# EAGLE board uCoNo-SR (EAGLE 5.11)
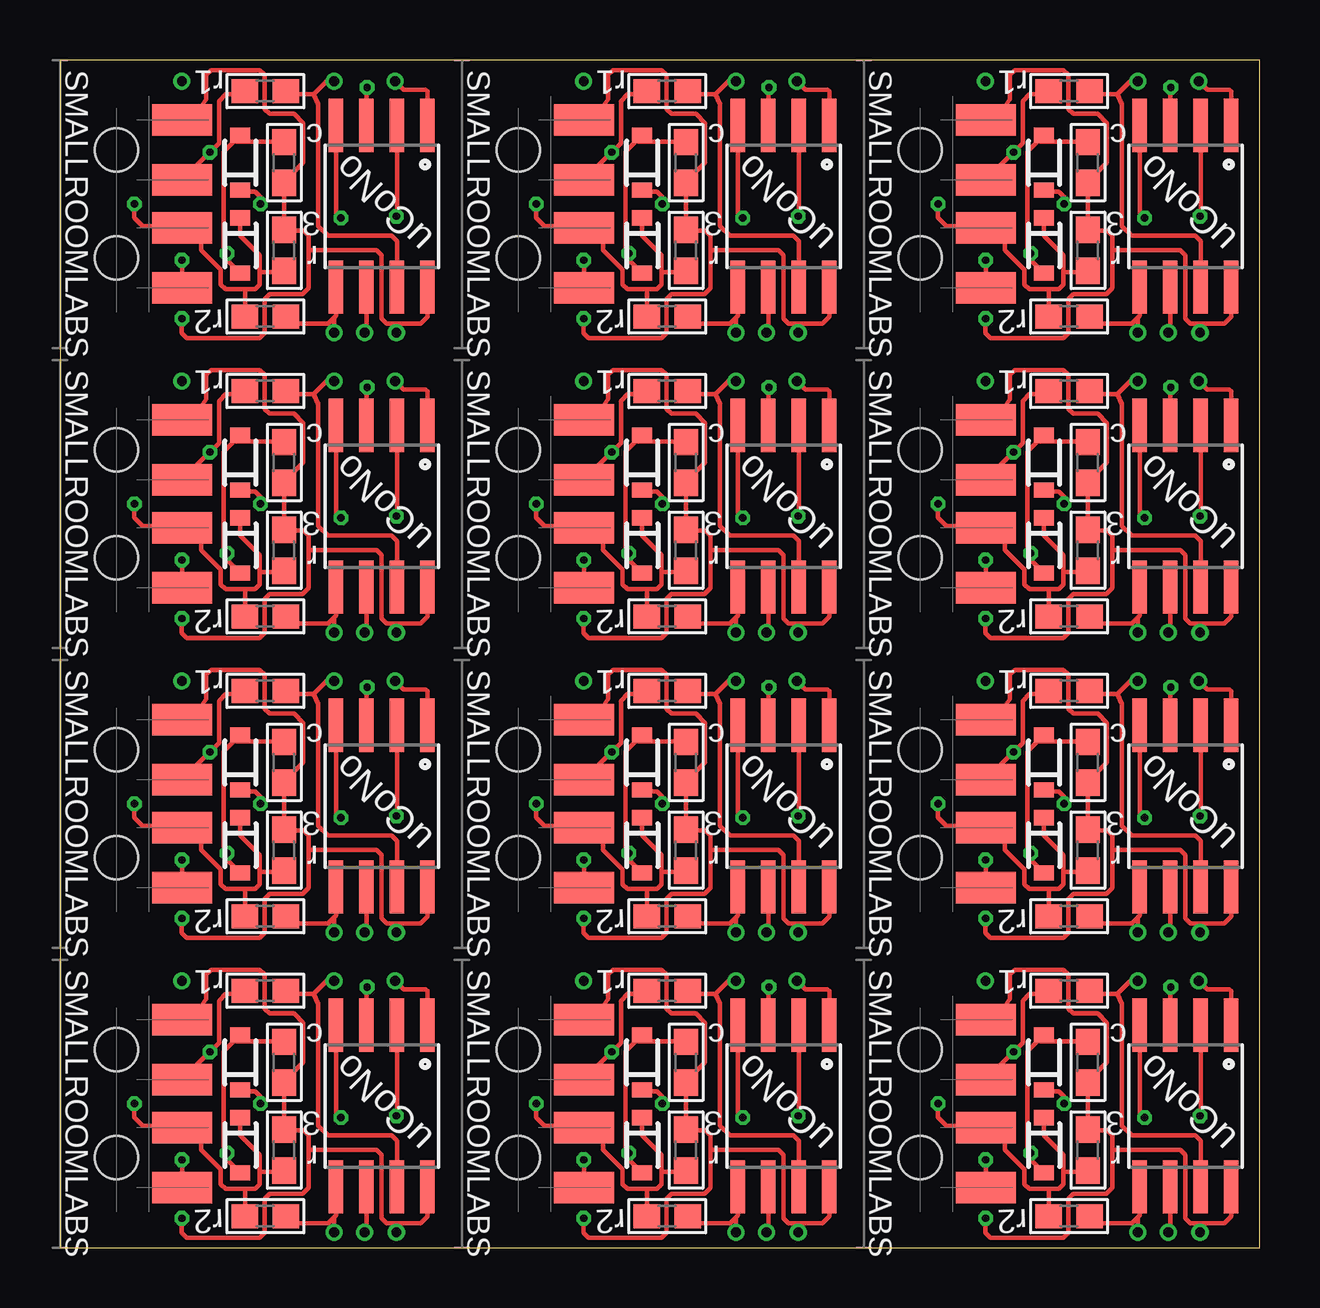
[diagram p0: board, top side]
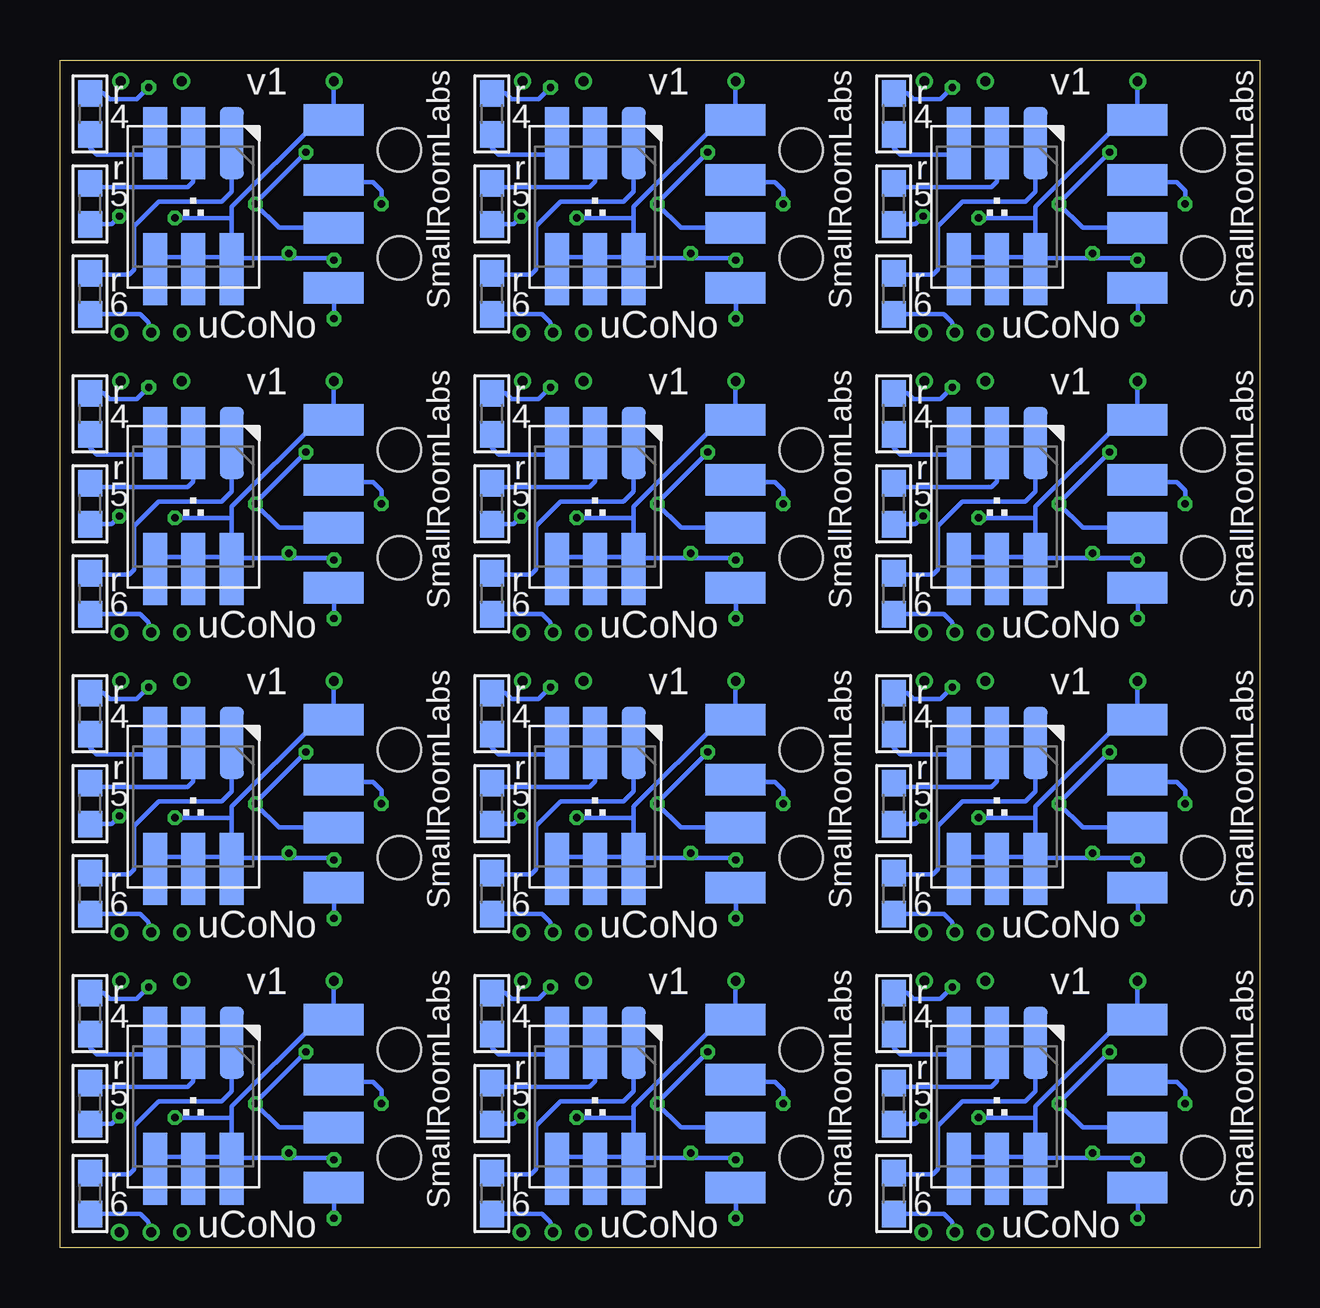
[diagram p1: board, bottom side, seen from below]

Size 50 x 49.5 mm. Coordinates in mm from the lower left corner, seen from the top.
Outline: 0,0 50,0 50,49.5 0,49.5 0,0
Copper layers (1*16): Top 0.035mm / dielectric 1.5mm / Bottom 0.035mm
Design rules "Fusion_eagle_rule_v1.1": minimum track width 6mil, minimum drill 12mil, track to track 6mil, track to pad 6mil, pad to pad 6mil, via to via 6mil, smd to smd 0mil, copper to edge 10mil, drill to drill 10mil, minimum pad ring 10mil, minimum via ring 6mil, stop-mask expansion 2mil, vias tented up to drill 100mil, thermal gap 10mil
Net classes: 0 default: width 0.178 mm, drill 0.305 mm, clearance 0.178 mm

## Footprints (pad centres in the part's own frame; a part is rotated, then mirrored left to right if it is on the bottom)
0603 = smd 1.1 x 1: 1 -0.85,0; 2 0.85,0
MC32604 = smd 1.3 x 2.5 bottom: BA 3.5,5.1; BB 1,5.1; BC -1,5.1; BD -3.5,5.1 | smd 1.3 x 2.5: TA -3.5,5.1; TB -1,5.1; TC 1,5.1; TD 3.5,5.1 | hole 1.8: -2.25,2.35; 2.25,2.35
SOD-323 = smd 0.63 x 0.83: 1 -1.15,0; 2 1.15,0
RGB-PLCC6L = smd 1 x 3: B+ 1.6,-2.658; B- 1.6,2.608; G+ 0,-2.658; G- 0,2.608; R+ -1.6,-2.658; R- -1.6,2.608
SO08-EIAJ = smd 0.61 x 2.21: 1 -1.905,-3.378; 2 -0.635,-3.378; 3 0.635,-3.378; 4 1.905,-3.378; 5 1.905,3.353; 6 0.635,3.353; 7 -0.635,3.353; 8 -1.905,3.353

## Placement (x,y rotation side)
C1  [0603]  9.35,7.72 90 top
C2  [0603]  9.35,20.22 90 top
C3  [0603]  9.35,32.72 90 top
C4  [0603]  9.35,45.22 90 top
C5  [0603]  26.1,45.22 90 top
C6  [0603]  42.85,45.22 90 top
C7  [0603]  26.1,32.72 90 top
C8  [0603]  42.85,32.72 90 top
C9  [0603]  26.1,20.22 90 top
C10  [0603]  42.85,20.22 90 top
C11  [0603]  26.1,7.72 90 top
C12  [0603]  42.85,7.72 90 top
CN1  USB-2LAYERMC32604  [MC32604]  0,6 270 top
CN2  USB-2LAYERMC32604  [MC32604]  0,18.5 270 top
CN3  USB-2LAYERMC32604  [MC32604]  0,31 270 top
CN4  USB-2LAYERMC32604  [MC32604]  0,43.5 270 top
CN5  USB-2LAYERMC32604  [MC32604]  16.75,43.5 270 top
CN6  USB-2LAYERMC32604  [MC32604]  33.5,43.5 270 top
CN7  USB-2LAYERMC32604  [MC32604]  16.75,31 270 top
CN8  USB-2LAYERMC32604  [MC32604]  33.5,31 270 top
CN9  USB-2LAYERMC32604  [MC32604]  16.75,18.5 270 top
CN10  USB-2LAYERMC32604  [MC32604]  33.5,18.5 270 top
CN11  USB-2LAYERMC32604  [MC32604]  16.75,6 270 top
CN12  USB-2LAYERMC32604  [MC32604]  33.5,6 270 top
D1  DIODE-ZENER-BZT52  [SOD-323]  7.52,4.27 270 top
D2  DIODE-ZENER-BZT52  [SOD-323]  7.52,7.72 90 top
D3  [RGB-PLCC6L]  10.94,5.88 180 bottom
D4  DIODE-ZENER-BZT52  [SOD-323]  7.52,20.22 90 top
D5  DIODE-ZENER-BZT52  [SOD-323]  7.52,16.77 270 top
D6  [RGB-PLCC6L]  10.94,18.38 180 bottom
D7  DIODE-ZENER-BZT52  [SOD-323]  7.52,32.72 90 top
D8  DIODE-ZENER-BZT52  [SOD-323]  7.52,29.27 270 top
D9  [RGB-PLCC6L]  10.94,30.88 180 bottom
D10  DIODE-ZENER-BZT52  [SOD-323]  7.52,45.22 90 top
D11  DIODE-ZENER-BZT52  [SOD-323]  7.52,41.77 270 top
D12  [RGB-PLCC6L]  10.94,43.38 180 bottom
D13  DIODE-ZENER-BZT52  [SOD-323]  24.27,45.22 90 top
D14  DIODE-ZENER-BZT52  [SOD-323]  24.27,41.77 270 top
D15  [RGB-PLCC6L]  27.69,43.38 180 bottom
D16  DIODE-ZENER-BZT52  [SOD-323]  41.02,45.22 90 top
D17  DIODE-ZENER-BZT52  [SOD-323]  41.02,41.77 270 top
D18  [RGB-PLCC6L]  44.44,43.38 180 bottom
D19  DIODE-ZENER-BZT52  [SOD-323]  24.27,32.72 90 top
D20  DIODE-ZENER-BZT52  [SOD-323]  24.27,29.27 270 top
D21  [RGB-PLCC6L]  27.69,30.88 180 bottom
D22  DIODE-ZENER-BZT52  [SOD-323]  41.02,32.72 90 top
D23  DIODE-ZENER-BZT52  [SOD-323]  41.02,29.27 270 top
D24  [RGB-PLCC6L]  44.44,30.88 180 bottom
D25  DIODE-ZENER-BZT52  [SOD-323]  24.27,20.22 90 top
D26  DIODE-ZENER-BZT52  [SOD-323]  24.27,16.77 270 top
D27  [RGB-PLCC6L]  27.69,18.38 180 bottom
D28  DIODE-ZENER-BZT52  [SOD-323]  41.02,20.22 90 top
D29  DIODE-ZENER-BZT52  [SOD-323]  41.02,16.77 270 top
D30  [RGB-PLCC6L]  44.44,18.38 180 bottom
D31  DIODE-ZENER-BZT52  [SOD-323]  24.27,7.72 90 top
D32  DIODE-ZENER-BZT52  [SOD-323]  24.27,4.27 270 top
D33  [RGB-PLCC6L]  27.69,5.88 180 bottom
D34  DIODE-ZENER-BZT52  [SOD-323]  41.02,7.72 90 top
D35  DIODE-ZENER-BZT52  [SOD-323]  41.02,4.27 270 top
D36  [RGB-PLCC6L]  44.44,5.88 180 bottom
R1  [0603]  8.56,10.7 0 top
R2  [0603]  8.56,1.31 0 top
R3  [0603]  9.35,4.06 90 top
R4  [0603]  15.25,9.75 270 bottom
R5  [0603]  15.25,6 90 bottom
R6  [0603]  15.25,2.25 90 bottom
R7  [0603]  15.25,14.75 90 bottom
R8  [0603]  15.25,18.5 90 bottom
R9  [0603]  15.25,22.25 270 bottom
R10  [0603]  8.56,13.81 0 top
R11  [0603]  8.56,23.2 0 top
R12  [0603]  9.35,16.56 90 top
R13  [0603]  15.25,27.25 90 bottom
R14  [0603]  15.25,31 90 bottom
R15  [0603]  15.25,34.75 270 bottom
R16  [0603]  8.56,26.31 0 top
R17  [0603]  8.56,35.7 0 top
R18  [0603]  9.35,29.06 90 top
R19  [0603]  15.25,39.75 90 bottom
R20  [0603]  15.25,43.5 90 bottom
R21  [0603]  15.25,47.25 270 bottom
R22  [0603]  8.56,38.81 0 top
R23  [0603]  8.56,48.2 0 top
R24  [0603]  9.35,41.56 90 top
R25  [0603]  32,39.75 90 bottom
R26  [0603]  32,43.5 90 bottom
R27  [0603]  32,47.25 270 bottom
R28  [0603]  25.31,38.81 0 top
R29  [0603]  25.31,48.2 0 top
R30  [0603]  26.1,41.56 90 top
R31  [0603]  48.75,39.75 90 bottom
R32  [0603]  48.75,43.5 90 bottom
R33  [0603]  48.75,47.25 270 bottom
R34  [0603]  42.06,38.81 0 top
R35  [0603]  42.06,48.2 0 top
R36  [0603]  42.85,41.56 90 top
R37  [0603]  32,27.25 90 bottom
R38  [0603]  32,31 90 bottom
R39  [0603]  32,34.75 270 bottom
R40  [0603]  25.31,26.31 0 top
R41  [0603]  25.31,35.7 0 top
R42  [0603]  26.1,29.06 90 top
R43  [0603]  48.75,27.25 90 bottom
R44  [0603]  48.75,31 90 bottom
R45  [0603]  48.75,34.75 270 bottom
R46  [0603]  42.06,26.31 0 top
R47  [0603]  42.06,35.7 0 top
R48  [0603]  42.85,29.06 90 top
R49  [0603]  32,14.75 90 bottom
R50  [0603]  32,18.5 90 bottom
R51  [0603]  32,22.25 270 bottom
R52  [0603]  25.31,13.81 0 top
R53  [0603]  25.31,23.2 0 top
R54  [0603]  26.1,16.56 90 top
R55  [0603]  48.75,14.75 90 bottom
R56  [0603]  48.75,18.5 90 bottom
R57  [0603]  48.75,22.25 270 bottom
R58  [0603]  42.06,13.81 0 top
R59  [0603]  42.06,23.2 0 top
R60  [0603]  42.85,16.56 90 top
R61  [0603]  32,2.25 90 bottom
R62  [0603]  32,6 90 bottom
R63  [0603]  32,9.75 270 bottom
R64  [0603]  25.31,1.31 0 top
R65  [0603]  25.31,10.7 0 top
R66  [0603]  26.1,4.06 90 top
R67  [0603]  48.75,2.25 90 bottom
R68  [0603]  48.75,6 90 bottom
R69  [0603]  48.75,9.75 270 bottom
R70  [0603]  42.06,1.31 0 top
R71  [0603]  42.06,10.7 0 top
R72  [0603]  42.85,4.06 90 top
U1  ATTINY45  [SO08-EIAJ]  13.41,5.89 180 top
U2  ATTINY45  [SO08-EIAJ]  13.41,18.39 180 top
U3  ATTINY45  [SO08-EIAJ]  13.41,30.89 180 top
U4  ATTINY45  [SO08-EIAJ]  13.41,43.39 180 top
U5  ATTINY45  [SO08-EIAJ]  30.16,43.39 180 top
U6  ATTINY45  [SO08-EIAJ]  46.91,43.39 180 top
U7  ATTINY45  [SO08-EIAJ]  30.16,30.89 180 top
U8  ATTINY45  [SO08-EIAJ]  46.91,30.89 180 top
U9  ATTINY45  [SO08-EIAJ]  30.16,18.39 180 top
U10  ATTINY45  [SO08-EIAJ]  46.91,18.39 180 top
U11  ATTINY45  [SO08-EIAJ]  30.16,5.89 180 top
U12  ATTINY45  [SO08-EIAJ]  46.91,5.89 180 top

## Library data of the parts
C1-C12 R1-R72 = microbuilder
CN1-CN12 D3 D6 D9 D12 D15 D18 D21 D24 D27 D30 D33 D36 = SmallRoomLabs
D1 D2 D4 D5 D7 D8 D10 D11 D13 D14 D16 D17 D19 D20 D22 D23 D25 D26 D28 D29 D31 D32 D34 D35 U1-U12 = SparkFun

## Nets
BLUE: R4.1 U1.3
BLUE1: R9.1 U2.3
BLUE2: R15.1 U3.3
BLUE3: R21.1 U4.3
BLUE4: R27.1 U5.3
BLUE5: R33.1 U6.3
BLUE6: R39.1 U7.3
BLUE7: R45.1 U8.3
BLUE8: R51.1 U9.3
BLUE9: R57.1 U10.3
BLUE10: R63.1 U11.3
BLUE11: R69.1 U12.3
BLUEA: D3.B+ R4.2
BLUEA1: D6.B+ R9.2
BLUEA2: D9.B+ R15.2
BLUEA3: D12.B+ R21.2
BLUEA4: D15.B+ R27.2
BLUEA5: D18.B+ R33.2
BLUEA6: D21.B+ R39.2
BLUEA7: D24.B+ R45.2
BLUEA8: D27.B+ R51.2
BLUEA9: D30.B+ R57.2
BLUEA10: D33.B+ R63.2
BLUEA11: D36.B+ R69.2
D+: CN1.BB CN1.TB D2.1 R1.1
D+1: CN2.BB CN2.TB D4.1 R11.1
D+2: CN3.BB CN3.TB D7.1 R17.1
D+3: CN4.BB CN4.TB D10.1 R23.1
D+4: CN5.BB CN5.TB D13.1 R29.1
D+5: CN6.BB CN6.TB D16.1 R35.1
D+6: CN7.BB CN7.TB D19.1 R41.1
D+7: CN8.BB CN8.TB D22.1 R47.1
D+8: CN9.BB CN9.TB D25.1 R53.1
D+9: CN10.BB CN10.TB D28.1 R59.1
D+10: CN11.BB CN11.TB D31.1 R65.1
D+11: CN12.BB CN12.TB D34.1 R71.1
D-: CN1.BC CN1.TC D1.1 R2.1 R3.1
D-1: CN2.BC CN2.TC D5.1 R10.1 R12.1
D-2: CN3.BC CN3.TC D8.1 R16.1 R18.1
D-3: CN4.BC CN4.TC D11.1 R22.1 R24.1
D-4: CN5.BC CN5.TC D14.1 R28.1 R30.1
D-5: CN6.BC CN6.TC D17.1 R34.1 R36.1
D-6: CN7.BC CN7.TC D20.1 R40.1 R42.1
D-7: CN8.BC CN8.TC D23.1 R46.1 R48.1
D-8: CN9.BC CN9.TC D26.1 R52.1 R54.1
D-9: CN10.BC CN10.TC D29.1 R58.1 R60.1
D-10: CN11.BC CN11.TC D32.1 R64.1 R66.1
D-11: CN12.BC CN12.TC D35.1 R70.1 R72.1
DATA+_SCK: R1.2 U1.7
DATA+_SCK1: R11.2 U2.7
DATA+_SCK2: R17.2 U3.7
DATA+_SCK3: R23.2 U4.7
DATA+_SCK4: R29.2 U5.7
DATA+_SCK5: R35.2 U6.7
DATA+_SCK6: R41.2 U7.7
DATA+_SCK7: R47.2 U8.7
DATA+_SCK8: R53.2 U9.7
DATA+_SCK9: R59.2 U10.7
DATA+_SCK10: R65.2 U11.7
DATA+_SCK11: R71.2 U12.7
DATA-_MOSI: R2.2 U1.5
DATA-_MOSI1: R10.2 U2.5
DATA-_MOSI2: R16.2 U3.5
DATA-_MOSI3: R22.2 U4.5
DATA-_MOSI4: R28.2 U5.5
DATA-_MOSI5: R34.2 U6.5
DATA-_MOSI6: R40.2 U7.5
DATA-_MOSI7: R46.2 U8.5
DATA-_MOSI8: R52.2 U9.5
DATA-_MOSI9: R58.2 U10.5
DATA-_MOSI10: R64.2 U11.5
DATA-_MOSI11: R70.2 U12.5
GND: C1.2 CN1.BD CN1.TD D1.2 D2.2 D3.B- D3.G- D3.R- U1.4
GND1: C2.2 CN2.BD CN2.TD D4.2 D5.2 D6.B- D6.G- D6.R- U2.4
GND2: C3.2 CN3.BD CN3.TD D7.2 D8.2 D9.B- D9.G- D9.R- U3.4
GND3: C4.2 CN4.BD CN4.TD D10.2 D11.2 D12.B- D12.G- D12.R- U4.4
GND4: C5.2 CN5.BD CN5.TD D13.2 D14.2 D15.B- D15.G- D15.R- U5.4
GND5: C6.2 CN6.BD CN6.TD D16.2 D17.2 D18.B- D18.G- D18.R- U6.4
GND6: C7.2 CN7.BD CN7.TD D19.2 D20.2 D21.B- D21.G- D21.R- U7.4
GND7: C8.2 CN8.BD CN8.TD D22.2 D23.2 D24.B- D24.G- D24.R- U8.4
GND8: C9.2 CN9.BD CN9.TD D25.2 D26.2 D27.B- D27.G- D27.R- U9.4
GND9: C10.2 CN10.BD CN10.TD D28.2 D29.2 D30.B- D30.G- D30.R- U10.4
GND10: C11.2 CN11.BD CN11.TD D31.2 D32.2 D33.B- D33.G- D33.R- U11.4
GND11: C12.2 CN12.BD CN12.TD D34.2 D35.2 D36.B- D36.G- D36.R- U12.4
GREEN: R5.1 U1.2
GREEN1: R8.1 U2.2
GREEN2: R14.1 U3.2
GREEN3: R20.1 U4.2
GREEN4: R26.1 U5.2
GREEN5: R32.1 U6.2
GREEN6: R38.1 U7.2
GREEN7: R44.1 U8.2
GREEN8: R50.1 U9.2
GREEN9: R56.1 U10.2
GREEN10: R62.1 U11.2
GREEN11: R68.1 U12.2
GREENA: D3.G+ R5.2
GREENA1: D6.G+ R8.2
GREENA2: D9.G+ R14.2
GREENA3: D12.G+ R20.2
GREENA4: D15.G+ R26.2
GREENA5: D18.G+ R32.2
GREENA6: D21.G+ R38.2
GREENA7: D24.G+ R44.2
GREENA8: D27.G+ R50.2
GREENA9: D30.G+ R56.2
GREENA10: D33.G+ R62.2
GREENA11: D36.G+ R68.2
RED_MISO: R6.1 U1.6
RED_MISO1: R7.1 U2.6
RED_MISO2: R13.1 U3.6
RED_MISO3: R19.1 U4.6
RED_MISO4: R25.1 U5.6
RED_MISO5: R31.1 U6.6
RED_MISO6: R37.1 U7.6
RED_MISO7: R43.1 U8.6
RED_MISO8: R49.1 U9.6
RED_MISO9: R55.1 U10.6
RED_MISO10: R61.1 U11.6
RED_MISO11: R67.1 U12.6
REDA: D3.R+ R6.2
REDA1: D6.R+ R7.2
REDA2: D9.R+ R13.2
REDA3: D12.R+ R19.2
REDA4: D15.R+ R25.2
REDA5: D18.R+ R31.2
REDA6: D21.R+ R37.2
REDA7: D24.R+ R43.2
REDA8: D27.R+ R49.2
REDA9: D30.R+ R55.2
REDA10: D33.R+ R61.2
REDA11: D36.R+ R67.2
RES: U1.1
RES1: U2.1
RES2: U3.1
RES3: U4.1
RES4: U5.1
RES5: U6.1
RES6: U7.1
RES7: U8.1
RES8: U9.1
RES9: U10.1
RES10: U11.1
RES11: U12.1
VCC: C1.1 CN1.BA CN1.TA R3.2 U1.8
VCC1: C2.1 CN2.BA CN2.TA R12.2 U2.8
VCC2: C3.1 CN3.BA CN3.TA R18.2 U3.8
VCC3: C4.1 CN4.BA CN4.TA R24.2 U4.8
VCC4: C5.1 CN5.BA CN5.TA R30.2 U5.8
VCC5: C6.1 CN6.BA CN6.TA R36.2 U6.8
VCC6: C7.1 CN7.BA CN7.TA R42.2 U7.8
VCC7: C8.1 CN8.BA CN8.TA R48.2 U8.8
VCC8: C9.1 CN9.BA CN9.TA R54.2 U9.8
VCC9: C10.1 CN10.BA CN10.TA R60.2 U10.8
VCC10: C11.1 CN11.BA CN11.TA R66.2 U11.8
VCC11: C12.1 CN12.BA CN12.TA R72.2 U12.8

## Tracks (layer width: path | path; a pad name or v marks a point on that pad's centre or on a via)
BLUE  (via drill 0.3)
  Top 0.178: U1.3 12.78,10.83 v12.8,10.86
  Bottom 0.178: R4.1 15.24,10.62 14.68,10.62 14.43,10.36 13.3,10.36 v12.8,10.86
BLUE1  (via drill 0.3)
  Top 0.178: U2.3 12.78,23.33 v12.8,23.36
  Bottom 0.178: R9.1 15.24,23.12 14.68,23.12 14.43,22.86 13.3,22.86 v12.8,23.36
BLUE2  (via drill 0.3)
  Top 0.178: U3.3 12.78,35.83 v12.8,35.86
  Bottom 0.178: R15.1 15.24,35.62 14.68,35.62 14.43,35.36 13.3,35.36 v12.8,35.86
BLUE3  (via drill 0.3)
  Top 0.178: U4.3 12.78,48.33 v12.8,48.36
  Bottom 0.178: R21.1 15.24,48.12 14.68,48.12 14.43,47.86 13.3,47.86 v12.8,48.36
BLUE4  (via drill 0.3)
  Top 0.178: U5.3 29.53,48.33 v29.55,48.36
  Bottom 0.178: R27.1 31.99,48.12 31.43,48.12 31.18,47.86 30.05,47.86 v29.55,48.36
BLUE5  (via drill 0.3)
  Top 0.178: U6.3 46.28,48.33 v46.3,48.36
  Bottom 0.178: R33.1 48.74,48.12 48.18,48.12 47.93,47.86 46.8,47.86 v46.3,48.36
BLUE6  (via drill 0.3)
  Top 0.178: U7.3 29.53,35.83 v29.55,35.86
  Bottom 0.178: R39.1 31.99,35.62 31.43,35.62 31.18,35.36 30.05,35.36 v29.55,35.86
BLUE7  (via drill 0.3)
  Top 0.178: U8.3 46.28,35.83 v46.3,35.86
  Bottom 0.178: R45.1 48.74,35.62 48.18,35.62 47.93,35.36 46.8,35.36 v46.3,35.86
BLUE8  (via drill 0.3)
  Top 0.178: U9.3 29.53,23.33 v29.55,23.36
  Bottom 0.178: R51.1 31.99,23.12 31.43,23.12 31.18,22.86 30.05,22.86 v29.55,23.36
BLUE9  (via drill 0.3)
  Top 0.178: U10.3 46.28,23.33 v46.3,23.36
  Bottom 0.178: R57.1 48.74,23.12 48.18,23.12 47.93,22.86 46.8,22.86 v46.3,23.36
BLUE10  (via drill 0.3)
  Top 0.178: U11.3 29.53,10.83 v29.55,10.86
  Bottom 0.178: R63.1 31.99,10.62 31.43,10.62 31.18,10.36 30.05,10.36 v29.55,10.86
BLUE11  (via drill 0.3)
  Top 0.178: U12.3 46.28,10.83 v46.3,10.86
  Bottom 0.178: R69.1 48.74,10.62 48.18,10.62 47.93,10.36 46.8,10.36 v46.3,10.86
BLUEA
  Bottom 0.178: D3.B+ 12.55,8.05 14.96,8.05 15.24,8.33 R4.2
BLUEA1
  Bottom 0.178: D6.B+ 12.55,20.55 14.96,20.55 15.24,20.83 R9.2
BLUEA2
  Bottom 0.178: D9.B+ 12.55,33.05 14.96,33.05 15.24,33.33 R15.2
BLUEA3
  Bottom 0.178: D12.B+ 12.55,45.55 14.96,45.55 15.24,45.83 R21.2
BLUEA4
  Bottom 0.178: D15.B+ 29.3,45.55 31.71,45.55 31.99,45.83 R27.2
BLUEA5
  Bottom 0.178: D18.B+ 46.05,45.55 48.46,45.55 48.74,45.83 R33.2
BLUEA6
  Bottom 0.178: D21.B+ 29.3,33.05 31.71,33.05 31.99,33.33 R39.2
BLUEA7
  Bottom 0.178: D24.B+ 46.05,33.05 48.46,33.05 48.74,33.33 R45.2
BLUEA8
  Bottom 0.178: D27.B+ 29.3,20.55 31.71,20.55 31.99,20.83 R51.2
BLUEA9
  Bottom 0.178: D30.B+ 46.05,20.55 48.46,20.55 48.74,20.83 R57.2
BLUEA10
  Bottom 0.178: D33.B+ 29.3,8.05 31.71,8.05 31.99,8.33 R63.2
BLUEA11
  Bottom 0.178: D36.B+ 46.05,8.05 48.46,8.05 48.74,8.33 R69.2
D+  (via drill 0.3)
  Top 0.178: 7.52,6.55 D2.1 7.59,6.5 8.13,6.5 8.36,6.27 v8.36,5.99 | 7.7,10.69 R1.1 7.57,10.57 6.91,10.57 6.63,10.29 6.63,8.53 v6.25,8.15 CN1.TB
  Bottom 0.178: CN1.BB 7.37,5 v8.36,5.99 8.33,6.07 v6.25,8.15
D+1  (via drill 0.3)
  Top 0.178: 7.52,19.05 D4.1 7.59,19 8.13,19 8.36,18.77 v8.36,18.49 | 7.7,23.19 R11.1 7.57,23.07 6.91,23.07 6.63,22.79 6.63,21.03 v6.25,20.65 CN2.TB
  Bottom 0.178: CN2.BB 7.37,17.5 v8.36,18.49 8.33,18.57 v6.25,20.65
D+2  (via drill 0.3)
  Top 0.178: 7.52,31.55 D7.1 7.59,31.5 8.13,31.5 8.36,31.27 v8.36,30.99 | 7.7,35.69 R17.1 7.57,35.57 6.91,35.57 6.63,35.29 6.63,33.53 v6.25,33.15 CN3.TB
  Bottom 0.178: CN3.BB 7.37,30 v8.36,30.99 8.33,31.07 v6.25,33.15
D+3  (via drill 0.3)
  Top 0.178: 7.52,44.05 D10.1 7.59,44 8.13,44 8.36,43.77 v8.36,43.49 | 7.7,48.19 R23.1 7.57,48.07 6.91,48.07 6.63,47.79 6.63,46.03 v6.25,45.65 CN4.TB
  Bottom 0.178: CN4.BB 7.37,42.5 v8.36,43.49 8.33,43.57 v6.25,45.65
D+4  (via drill 0.3)
  Top 0.178: 24.27,44.05 D13.1 24.34,44 24.88,44 25.11,43.77 v25.11,43.49 | 24.45,48.19 R29.1 24.32,48.07 23.66,48.07 23.38,47.79 23.38,46.03 v23,45.65 CN5.TB
  Bottom 0.178: CN5.BB 24.12,42.5 v25.11,43.49 25.08,43.57 v23,45.65
D+5  (via drill 0.3)
  Top 0.178: 41.02,44.05 D16.1 41.09,44 41.63,44 41.86,43.77 v41.86,43.49 | 41.2,48.19 R35.1 41.07,48.07 40.41,48.07 40.13,47.79 40.13,46.03 v39.75,45.65 CN6.TB
  Bottom 0.178: CN6.BB 40.87,42.5 v41.86,43.49 41.83,43.57 v39.75,45.65
D+6  (via drill 0.3)
  Top 0.178: 24.27,31.55 D19.1 24.34,31.5 24.88,31.5 25.11,31.27 v25.11,30.99 | 24.45,35.69 R41.1 24.32,35.57 23.66,35.57 23.38,35.29 23.38,33.53 v23,33.15 CN7.TB
  Bottom 0.178: CN7.BB 24.12,30 v25.11,30.99 25.08,31.07 v23,33.15
D+7  (via drill 0.3)
  Top 0.178: 41.02,31.55 D22.1 41.09,31.5 41.63,31.5 41.86,31.27 v41.86,30.99 | 41.2,35.69 R47.1 41.07,35.57 40.41,35.57 40.13,35.29 40.13,33.53 v39.75,33.15 CN8.TB
  Bottom 0.178: CN8.BB 40.87,30 v41.86,30.99 41.83,31.07 v39.75,33.15
D+8  (via drill 0.3)
  Top 0.178: 24.27,19.05 D25.1 24.34,19 24.88,19 25.11,18.77 v25.11,18.49 | 24.45,23.19 R53.1 24.32,23.07 23.66,23.07 23.38,22.79 23.38,21.03 v23,20.65 CN9.TB
  Bottom 0.178: CN9.BB 24.12,17.5 v25.11,18.49 25.08,18.57 v23,20.65
D+9  (via drill 0.3)
  Top 0.178: 41.02,19.05 D28.1 41.09,19 41.63,19 41.86,18.77 v41.86,18.49 | 41.2,23.19 R59.1 41.07,23.07 40.41,23.07 40.13,22.79 40.13,21.03 v39.75,20.65 CN10.TB
  Bottom 0.178: CN10.BB 40.87,17.5 v41.86,18.49 41.83,18.57 v39.75,20.65
D+10  (via drill 0.3)
  Top 0.178: 24.27,6.55 D31.1 24.34,6.5 24.88,6.5 25.11,6.27 v25.11,5.99 | 24.45,10.69 R65.1 24.32,10.57 23.66,10.57 23.38,10.29 23.38,8.53 v23,8.15 CN11.TB
  Bottom 0.178: CN11.BB 24.12,5 v25.11,5.99 25.08,6.07 v23,8.15
D+11  (via drill 0.3)
  Top 0.178: 41.02,6.55 D34.1 41.09,6.5 41.63,6.5 41.86,6.27 v41.86,5.99 | 41.2,10.69 R71.1 41.07,10.57 40.41,10.57 40.13,10.29 40.13,8.53 v39.75,8.15 CN12.TB
  Bottom 0.178: CN12.BB 40.87,5 v41.86,5.99 41.83,6.07 v39.75,8.15
D-  (via drill 0.3)
  Top 0.178: 9.35,3.23 R3.1 9.3,3.15 8.33,3.15 | 7.72,1.32 R2.1 7.71,2.43 7.72,2.44 | CN1.TC 5.11,4.98 | CN1.TC 5.03,5.05 5,5.08 3.45,5.08 3.1,5.44 v3.1,5.99 | D1.1 7.52,4.67 8.33,3.86 8.33,3.15 | 8.33,3.15 8.33,2.64 8.13,2.44 7.72,2.44 | 7.72,2.44 6.91,2.44 6.71,2.64 6.71,3.25 5.89,4.06 5.89,4.88 5.22,4.88 CN1.TC
  Bottom 0.178: CN1.BC 5.08,6.99 5,6.91 3.45,6.91 3.1,6.55 v3.1,5.99
D-1  (via drill 0.3)
  Top 0.178: 9.35,15.73 R12.1 9.3,15.65 8.33,15.65 | 7.72,13.82 R10.1 7.71,14.93 7.72,14.94 | CN2.TC 5.11,17.48 | CN2.TC 5.03,17.55 5,17.58 3.45,17.58 3.1,17.94 v3.1,18.49 | D5.1 7.52,17.17 8.33,16.36 8.33,15.65 | 8.33,15.65 8.33,15.14 8.13,14.94 7.72,14.94 | 7.72,14.94 6.91,14.94 6.71,15.14 6.71,15.75 5.89,16.56 5.89,17.38 5.22,17.38 CN2.TC
  Bottom 0.178: CN2.BC 5.08,19.48 5,19.41 3.45,19.41 3.1,19.05 v3.1,18.49
D-2  (via drill 0.3)
  Top 0.178: 9.35,28.23 R18.1 9.3,28.15 8.33,28.15 | 7.72,26.32 R16.1 7.71,27.43 7.72,27.44 | CN3.TC 5.11,29.98 | CN3.TC 5.03,30.05 5,30.08 3.45,30.08 3.1,30.44 v3.1,30.99 | D8.1 7.52,29.67 8.33,28.86 8.33,28.15 | 8.33,28.15 8.33,27.64 8.13,27.44 7.72,27.44 | 7.72,27.44 6.91,27.44 6.71,27.64 6.71,28.25 5.89,29.06 5.89,29.88 5.22,29.88 CN3.TC
  Bottom 0.178: CN3.BC 5.08,31.98 5,31.91 3.45,31.91 3.1,31.55 v3.1,30.99
D-3  (via drill 0.3)
  Top 0.178: 9.35,40.73 R24.1 9.3,40.65 8.33,40.65 | 7.72,38.82 R22.1 7.71,39.93 7.72,39.94 | CN4.TC 5.11,42.48 | CN4.TC 5.03,42.55 5,42.58 3.45,42.58 3.1,42.94 v3.1,43.49 | D11.1 7.52,42.17 8.33,41.36 8.33,40.65 | 8.33,40.65 8.33,40.14 8.13,39.94 7.72,39.94 | 7.72,39.94 6.91,39.94 6.71,40.14 6.71,40.75 5.89,41.56 5.89,42.38 5.22,42.38 CN4.TC
  Bottom 0.178: CN4.BC 5.08,44.48 5,44.41 3.45,44.41 3.1,44.05 v3.1,43.49
D-4  (via drill 0.3)
  Top 0.178: 26.1,40.73 R30.1 26.05,40.65 25.08,40.65 | 24.47,38.82 R28.1 24.46,39.93 24.47,39.94 | CN5.TC 21.86,42.48 | CN5.TC 21.78,42.55 21.75,42.58 20.2,42.58 19.85,42.94 v19.85,43.49 | D14.1 24.27,42.17 25.08,41.36 25.08,40.65 | 25.08,40.65 25.08,40.14 24.88,39.94 24.47,39.94 | 24.47,39.94 23.66,39.94 23.46,40.14 23.46,40.75 22.64,41.56 22.64,42.38 21.97,42.38 CN5.TC
  Bottom 0.178: CN5.BC 21.83,44.48 21.75,44.41 20.2,44.41 19.85,44.05 v19.85,43.49
D-5  (via drill 0.3)
  Top 0.178: 42.85,40.73 R36.1 42.8,40.65 41.83,40.65 | 41.22,38.82 R34.1 41.21,39.93 41.22,39.94 | CN6.TC 38.6,42.48 | CN6.TC 38.53,42.55 38.5,42.58 36.95,42.58 36.6,42.94 v36.6,43.49 | D17.1 41.02,42.17 41.83,41.36 41.83,40.65 | 41.83,40.65 41.83,40.14 41.63,39.94 41.22,39.94 | 41.22,39.94 40.41,39.94 40.21,40.14 40.21,40.75 39.39,41.56 39.39,42.38 38.72,42.38 CN6.TC
  Bottom 0.178: CN6.BC 38.58,44.48 38.5,44.41 36.95,44.41 36.6,44.05 v36.6,43.49
D-6  (via drill 0.3)
  Top 0.178: 26.1,28.23 R42.1 26.05,28.15 25.08,28.15 | 24.47,26.32 R40.1 24.46,27.43 24.47,27.44 | CN7.TC 21.86,29.98 | CN7.TC 21.78,30.05 21.75,30.08 20.2,30.08 19.85,30.44 v19.85,30.99 | D20.1 24.27,29.67 25.08,28.86 25.08,28.15 | 25.08,28.15 25.08,27.64 24.88,27.44 24.47,27.44 | 24.47,27.44 23.66,27.44 23.46,27.64 23.46,28.25 22.64,29.06 22.64,29.88 21.97,29.88 CN7.TC
  Bottom 0.178: CN7.BC 21.83,31.98 21.75,31.91 20.2,31.91 19.85,31.55 v19.85,30.99
D-7  (via drill 0.3)
  Top 0.178: 42.85,28.23 R48.1 42.8,28.15 41.83,28.15 | 41.22,26.32 R46.1 41.21,27.43 41.22,27.44 | CN8.TC 38.6,29.98 | CN8.TC 38.53,30.05 38.5,30.08 36.95,30.08 36.6,30.44 v36.6,30.99 | D23.1 41.02,29.67 41.83,28.86 41.83,28.15 | 41.83,28.15 41.83,27.64 41.63,27.44 41.22,27.44 | 41.22,27.44 40.41,27.44 40.21,27.64 40.21,28.25 39.39,29.06 39.39,29.88 38.72,29.88 CN8.TC
  Bottom 0.178: CN8.BC 38.58,31.98 38.5,31.91 36.95,31.91 36.6,31.55 v36.6,30.99
D-8  (via drill 0.3)
  Top 0.178: 26.1,15.73 R54.1 26.05,15.65 25.08,15.65 | 24.47,13.82 R52.1 24.46,14.93 24.47,14.94 | CN9.TC 21.86,17.48 | CN9.TC 21.78,17.55 21.75,17.58 20.2,17.58 19.85,17.94 v19.85,18.49 | D26.1 24.27,17.17 25.08,16.36 25.08,15.65 | 25.08,15.65 25.08,15.14 24.88,14.94 24.47,14.94 | 24.47,14.94 23.66,14.94 23.46,15.14 23.46,15.75 22.64,16.56 22.64,17.38 21.97,17.38 CN9.TC
  Bottom 0.178: CN9.BC 21.83,19.48 21.75,19.41 20.2,19.41 19.85,19.05 v19.85,18.49
D-9  (via drill 0.3)
  Top 0.178: 42.85,15.73 R60.1 42.8,15.65 41.83,15.65 | 41.22,13.82 R58.1 41.21,14.93 41.22,14.94 | CN10.TC 38.6,17.48 | CN10.TC 38.53,17.55 38.5,17.58 36.95,17.58 36.6,17.94 v36.6,18.49 | D29.1 41.02,17.17 41.83,16.36 41.83,15.65 | 41.83,15.65 41.83,15.14 41.63,14.94 41.22,14.94 | 41.22,14.94 40.41,14.94 40.21,15.14 40.21,15.75 39.39,16.56 39.39,17.38 38.72,17.38 CN10.TC
  Bottom 0.178: CN10.BC 38.58,19.48 38.5,19.41 36.95,19.41 36.6,19.05 v36.6,18.49
D-10  (via drill 0.3)
  Top 0.178: 26.1,3.23 R66.1 26.05,3.15 25.08,3.15 | 24.47,1.32 R64.1 24.46,2.43 24.47,2.44 | CN11.TC 21.86,4.98 | CN11.TC 21.78,5.05 21.75,5.08 20.2,5.08 19.85,5.44 v19.85,5.99 | D32.1 24.27,4.67 25.08,3.86 25.08,3.15 | 25.08,3.15 25.08,2.64 24.88,2.44 24.47,2.44 | 24.47,2.44 23.66,2.44 23.46,2.64 23.46,3.25 22.64,4.06 22.64,4.88 21.97,4.88 CN11.TC
  Bottom 0.178: CN11.BC 21.83,6.99 21.75,6.91 20.2,6.91 19.85,6.55 v19.85,5.99
D-11  (via drill 0.3)
  Top 0.178: 42.85,3.23 R72.1 42.8,3.15 41.83,3.15 | 41.22,1.32 R70.1 41.21,2.43 41.22,2.44 | CN12.TC 38.6,4.98 | CN12.TC 38.53,5.05 38.5,5.08 36.95,5.08 36.6,5.44 v36.6,5.99 | D35.1 41.02,4.67 41.83,3.86 41.83,3.15 | 41.83,3.15 41.83,2.64 41.63,2.44 41.22,2.44 | 41.22,2.44 40.41,2.44 40.21,2.64 40.21,3.25 39.39,4.06 39.39,4.88 38.72,4.88 CN12.TC
  Bottom 0.178: CN12.BC 38.58,6.99 38.5,6.91 36.95,6.91 36.6,6.55 v36.6,5.99
DATA+_SCK  (via drill 0.41)
  Top 0.178: 9.68,10.57 9.55,10.57 9.42,10.69 R1.2 9.55,10.57 10.57,10.57 | U1.7 14.05,4.45 13.82,4.67 11.18,4.67 10.77,5.08 10.77,10.16 10.57,10.57 | v11.43,11.11 11.11,11.11 10.57,10.57
DATA+_SCK1  (via drill 0.41)
  Top 0.178: 9.68,23.07 9.55,23.07 9.42,23.19 R11.2 9.55,23.07 10.57,23.07 | U2.7 14.05,16.95 13.82,17.17 11.18,17.17 10.77,17.58 10.77,22.66 10.57,23.07 | v11.43,23.61 11.11,23.61 10.57,23.07
DATA+_SCK2  (via drill 0.41)
  Top 0.178: 9.68,35.57 9.55,35.57 9.42,35.69 R17.2 9.55,35.57 10.57,35.57 | U3.7 14.05,29.45 13.82,29.67 11.18,29.67 10.77,30.08 10.77,35.16 10.57,35.57 | v11.43,36.11 11.11,36.11 10.57,35.57
DATA+_SCK3  (via drill 0.41)
  Top 0.178: 9.68,48.07 9.55,48.07 9.42,48.19 R23.2 9.55,48.07 10.57,48.07 | U4.7 14.05,41.95 13.82,42.17 11.18,42.17 10.77,42.58 10.77,47.66 10.57,48.07 | v11.43,48.61 11.11,48.61 10.57,48.07
DATA+_SCK4  (via drill 0.41)
  Top 0.178: 26.43,48.07 26.3,48.07 26.17,48.19 R29.2 26.3,48.07 27.32,48.07 | U5.7 30.8,41.95 30.57,42.17 27.93,42.17 27.52,42.58 27.52,47.66 27.32,48.07 | v28.18,48.61 27.86,48.61 27.32,48.07
DATA+_SCK5  (via drill 0.41)
  Top 0.178: 43.18,48.07 43.05,48.07 42.92,48.19 R35.2 43.05,48.07 44.07,48.07 | U6.7 47.55,41.95 47.32,42.17 44.68,42.17 44.27,42.58 44.27,47.66 44.07,48.07 | v44.93,48.61 44.61,48.61 44.07,48.07
DATA+_SCK6  (via drill 0.41)
  Top 0.178: 26.43,35.57 26.3,35.57 26.17,35.69 R41.2 26.3,35.57 27.32,35.57 | U7.7 30.8,29.45 30.57,29.67 27.93,29.67 27.52,30.08 27.52,35.16 27.32,35.57 | v28.18,36.11 27.86,36.11 27.32,35.57
DATA+_SCK7  (via drill 0.41)
  Top 0.178: 43.18,35.57 43.05,35.57 42.92,35.69 R47.2 43.05,35.57 44.07,35.57 | U8.7 47.55,29.45 47.32,29.67 44.68,29.67 44.27,30.08 44.27,35.16 44.07,35.57 | v44.93,36.11 44.61,36.11 44.07,35.57
DATA+_SCK8  (via drill 0.41)
  Top 0.178: 26.43,23.07 26.3,23.07 26.17,23.19 R53.2 26.3,23.07 27.32,23.07 | U9.7 30.8,16.95 30.57,17.17 27.93,17.17 27.52,17.58 27.52,22.66 27.32,23.07 | v28.18,23.61 27.86,23.61 27.32,23.07
DATA+_SCK9  (via drill 0.41)
  Top 0.178: 43.18,23.07 43.05,23.07 42.92,23.19 R59.2 43.05,23.07 44.07,23.07 | U10.7 47.55,16.95 47.32,17.17 44.68,17.17 44.27,17.58 44.27,22.66 44.07,23.07 | v44.93,23.61 44.61,23.61 44.07,23.07
DATA+_SCK10  (via drill 0.41)
  Top 0.178: 26.43,10.57 26.3,10.57 26.17,10.69 R65.2 26.3,10.57 27.32,10.57 | U11.7 30.8,4.45 30.57,4.67 27.93,4.67 27.52,5.08 27.52,10.16 27.32,10.57 | v28.18,11.11 27.86,11.11 27.32,10.57
DATA+_SCK11  (via drill 0.41)
  Top 0.178: 43.18,10.57 43.05,10.57 42.92,10.69 R71.2 43.05,10.57 44.07,10.57 | U12.7 47.55,4.45 47.32,4.67 44.68,4.67 44.27,5.08 44.27,10.16 44.07,10.57 | v44.93,11.11 44.61,11.11 44.07,10.57
DATA-_MOSI  (via drill 0.41)
  Top 0.178: R2.2 9.42,1.32 9.73,1.02 11.18,1.02 11.43,1.27 | 11.43,1.27 11.51,1.35 U1.5 | 11.43,1.27 v11.43,0.64
DATA-_MOSI1  (via drill 0.41)
  Top 0.178: R10.2 9.42,13.82 9.73,13.52 11.18,13.52 11.43,13.77 | 11.43,13.77 11.51,13.85 U2.5 | 11.43,13.77 v11.43,13.13
DATA-_MOSI2  (via drill 0.41)
  Top 0.178: R16.2 9.42,26.32 9.73,26.02 11.18,26.02 11.43,26.27 | 11.43,26.27 11.51,26.35 U3.5 | 11.43,26.27 v11.43,25.64
DATA-_MOSI3  (via drill 0.41)
  Top 0.178: R22.2 9.42,38.82 9.73,38.52 11.18,38.52 11.43,38.77 | 11.43,38.77 11.51,38.85 U4.5 | 11.43,38.77 v11.43,38.13
DATA-_MOSI4  (via drill 0.41)
  Top 0.178: R28.2 26.17,38.82 26.48,38.52 27.93,38.52 28.18,38.77 | 28.18,38.77 28.26,38.85 U5.5 | 28.18,38.77 v28.18,38.13
DATA-_MOSI5  (via drill 0.41)
  Top 0.178: R34.2 42.92,38.82 43.23,38.52 44.68,38.52 44.93,38.77 | 44.93,38.77 45.01,38.85 U6.5 | 44.93,38.77 v44.93,38.13
DATA-_MOSI6  (via drill 0.41)
  Top 0.178: R40.2 26.17,26.32 26.48,26.02 27.93,26.02 28.18,26.27 | 28.18,26.27 28.26,26.35 U7.5 | 28.18,26.27 v28.18,25.64
DATA-_MOSI7  (via drill 0.41)
  Top 0.178: R46.2 42.92,26.32 43.23,26.02 44.68,26.02 44.93,26.27 | 44.93,26.27 45.01,26.35 U8.5 | 44.93,26.27 v44.93,25.64
DATA-_MOSI8  (via drill 0.41)
  Top 0.178: R52.2 26.17,13.82 26.48,13.52 27.93,13.52 28.18,13.77 | 28.18,13.77 28.26,13.85 U9.5 | 28.18,13.77 v28.18,13.13
DATA-_MOSI9  (via drill 0.41)
  Top 0.178: R58.2 42.92,13.82 43.23,13.52 44.68,13.52 44.93,13.77 | 44.93,13.77 45.01,13.85 U10.5 | 44.93,13.77 v44.93,13.13
DATA-_MOSI10  (via drill 0.41)
  Top 0.178: R64.2 26.17,1.32 26.48,1.02 27.93,1.02 28.18,1.27 | 28.18,1.27 28.26,1.35 U11.5 | 28.18,1.27 v28.18,0.64
DATA-_MOSI11  (via drill 0.41)
  Top 0.178: R70.2 42.92,1.32 43.23,1.02 44.68,1.02 44.93,1.27 | 44.93,1.27 45.01,1.35 U12.5 | 44.93,1.27 v44.93,0.64
GND  (via drill 0.3, 0.41)
  Top 0.178: 6.83,3.94 6.83,8.18 D2.2 7.34,8.59 9.35,8.59 C1.2 | 6.83,3.94 6.83,3.81 D1.2 | v6.96,3.94 6.83,3.94 | v5.08,3.66 5.1,3.66 CN1.TD | U1.4 11.51,5.62 v11.71,5.41
  Bottom 0.178: D3.R- 9.35,3.79 10.92,3.79 D3.G- | 12.52,3.79 D3.B- 12.53,3.79 11.02,3.79 D3.G- | 6.96,3.73 9.27,3.73 D3.R- | CN1.BD | D3.R- 8.94,3.81 | v6.96,3.94 6.96,3.73 | CN1.BD 5.71,9.5 9.34,5.88 9.34,5.49 | 6.96,3.73 5.08,3.73 v5.08,3.66 | D3.G- 10.97,3.81 | D3.R- 9.34,5.49 | v11.71,5.41 9.41,5.41 9.34,5.49 | CN1.BD 5.1,11.09 v5.08,11.11
GND1  (via drill 0.3, 0.41)
  Top 0.178: 6.83,16.44 6.83,20.68 D4.2 7.34,21.09 9.35,21.09 C2.2 | 6.83,16.44 6.83,16.31 D5.2 | v6.96,16.44 6.83,16.44 | v5.08,16.16 5.1,16.16 CN2.TD | U2.4 11.51,18.12 v11.71,17.91
  Bottom 0.178: D6.R- 9.35,16.29 10.92,16.29 D6.G- | 12.52,16.29 D6.B- 12.53,16.29 11.02,16.29 D6.G- | 6.96,16.23 9.27,16.23 D6.R- | CN2.BD | D6.R- 8.94,16.31 | v6.96,16.44 6.96,16.23 | CN2.BD 5.71,22 9.34,18.38 9.34,17.99 | 6.96,16.23 5.08,16.23 v5.08,16.16 | D6.G- 10.97,16.31 | D6.R- 9.34,17.99 | v11.71,17.91 9.41,17.91 9.34,17.99 | CN2.BD 5.1,23.59 v5.08,23.61
GND2  (via drill 0.3, 0.41)
  Top 0.178: 6.83,28.94 6.83,33.18 D7.2 7.34,33.59 9.35,33.59 C3.2 | 6.83,28.94 6.83,28.81 D8.2 | v6.96,28.94 6.83,28.94 | v5.08,28.66 5.1,28.66 CN3.TD | U3.4 11.51,30.62 v11.71,30.41
  Bottom 0.178: D9.R- 9.35,28.79 10.92,28.79 D9.G- | 12.52,28.79 D9.B- 12.53,28.79 11.02,28.79 D9.G- | 6.96,28.73 9.27,28.73 D9.R- | CN3.BD | D9.R- 8.94,28.81 | v6.96,28.94 6.96,28.73 | CN3.BD 5.71,34.5 9.34,30.88 9.34,30.49 | 6.96,28.73 5.08,28.73 v5.08,28.66 | D9.G- 10.97,28.81 | D9.R- 9.34,30.49 | v11.71,30.41 9.41,30.41 9.34,30.49 | CN3.BD 5.1,36.09 v5.08,36.11
GND3  (via drill 0.3, 0.41)
  Top 0.178: 6.83,41.44 6.83,45.68 D10.2 7.34,46.09 9.35,46.09 C4.2 | 6.83,41.44 6.83,41.31 D11.2 | v6.96,41.44 6.83,41.44 | v5.08,41.16 5.1,41.16 CN4.TD | U4.4 11.51,43.12 v11.71,42.91
  Bottom 0.178: D12.R- 9.35,41.28 10.92,41.28 D12.G- | 12.52,41.28 D12.B- 12.53,41.28 11.02,41.28 D12.G- | 6.96,41.23 9.27,41.23 D12.R- | CN4.BD | D12.R- 8.94,41.31 | v6.96,41.44 6.96,41.23 | CN4.BD 5.71,47 9.34,43.38 9.34,42.99 | 6.96,41.23 5.08,41.23 v5.08,41.16 | D12.G- 10.97,41.31 | D12.R- 9.34,42.99 | v11.71,42.91 9.41,42.91 9.34,42.99 | CN4.BD 5.1,48.59 v5.08,48.61
GND4  (via drill 0.3, 0.41)
  Top 0.178: 23.58,41.44 23.58,45.68 D13.2 24.09,46.09 26.1,46.09 C5.2 | 23.58,41.44 23.58,41.31 D14.2 | v23.71,41.44 23.58,41.44 | v21.83,41.16 21.85,41.16 CN5.TD | U5.4 28.26,43.12 v28.46,42.91
  Bottom 0.178: D15.R- 26.1,41.28 27.67,41.28 D15.G- | 29.27,41.28 D15.B- 29.28,41.28 27.77,41.28 D15.G- | 23.71,41.23 26.02,41.23 D15.R- | CN5.BD | D15.R- 25.69,41.31 | v23.71,41.44 23.71,41.23 | CN5.BD 22.46,47 26.09,43.38 26.09,42.99 | 23.71,41.23 21.83,41.23 v21.83,41.16 | D15.G- 27.72,41.31 | D15.R- 26.09,42.99 | v28.46,42.91 26.16,42.91 26.09,42.99 | CN5.BD 21.85,48.59 v21.83,48.61
GND5  (via drill 0.3, 0.41)
  Top 0.178: 40.33,41.44 40.33,45.68 D16.2 40.84,46.09 42.85,46.09 C6.2 | 40.33,41.44 40.33,41.31 D17.2 | v40.46,41.44 40.33,41.44 | v38.58,41.16 38.6,41.16 CN6.TD | U6.4 45.01,43.12 v45.21,42.91
  Bottom 0.178: D18.R- 42.85,41.28 44.42,41.28 D18.G- | 46.02,41.28 D18.B- 46.03,41.28 44.52,41.28 D18.G- | 40.46,41.23 42.77,41.23 D18.R- | CN6.BD | D18.R- 42.44,41.31 | v40.46,41.44 40.46,41.23 | CN6.BD 39.22,47 42.84,43.38 42.84,42.99 | 40.46,41.23 38.58,41.23 v38.58,41.16 | D18.G- 44.47,41.31 | D18.R- 42.84,42.99 | v45.21,42.91 42.91,42.91 42.84,42.99 | CN6.BD 38.6,48.59 v38.58,48.61
GND6  (via drill 0.3, 0.41)
  Top 0.178: 23.58,28.94 23.58,33.18 D19.2 24.09,33.59 26.1,33.59 C7.2 | 23.58,28.94 23.58,28.81 D20.2 | v23.71,28.94 23.58,28.94 | v21.83,28.66 21.85,28.66 CN7.TD | U7.4 28.26,30.62 v28.46,30.41
  Bottom 0.178: D21.R- 26.1,28.79 27.67,28.79 D21.G- | 29.27,28.79 D21.B- 29.28,28.79 27.77,28.79 D21.G- | 23.71,28.73 26.02,28.73 D21.R- | CN7.BD | D21.R- 25.69,28.81 | v23.71,28.94 23.71,28.73 | CN7.BD 22.46,34.5 26.09,30.88 26.09,30.49 | 23.71,28.73 21.83,28.73 v21.83,28.66 | D21.G- 27.72,28.81 | D21.R- 26.09,30.49 | v28.46,30.41 26.16,30.41 26.09,30.49 | CN7.BD 21.85,36.09 v21.83,36.11
GND7  (via drill 0.3, 0.41)
  Top 0.178: 40.33,28.94 40.33,33.18 D22.2 40.84,33.59 42.85,33.59 C8.2 | 40.33,28.94 40.33,28.81 D23.2 | v40.46,28.94 40.33,28.94 | v38.58,28.66 38.6,28.66 CN8.TD | U8.4 45.01,30.62 v45.21,30.41
  Bottom 0.178: D24.R- 42.85,28.79 44.42,28.79 D24.G- | 46.02,28.79 D24.B- 46.03,28.79 44.52,28.79 D24.G- | 40.46,28.73 42.77,28.73 D24.R- | CN8.BD | D24.R- 42.44,28.81 | v40.46,28.94 40.46,28.73 | CN8.BD 39.22,34.5 42.84,30.88 42.84,30.49 | 40.46,28.73 38.58,28.73 v38.58,28.66 | D24.G- 44.47,28.81 | D24.R- 42.84,30.49 | v45.21,30.41 42.91,30.41 42.84,30.49 | CN8.BD 38.6,36.09 v38.58,36.11
GND8  (via drill 0.3, 0.41)
  Top 0.178: 23.58,16.44 23.58,20.68 D25.2 24.09,21.09 26.1,21.09 C9.2 | 23.58,16.44 23.58,16.31 D26.2 | v23.71,16.44 23.58,16.44 | v21.83,16.16 21.85,16.16 CN9.TD | U9.4 28.26,18.12 v28.46,17.91
  Bottom 0.178: D27.R- 26.1,16.29 27.67,16.29 D27.G- | 29.27,16.29 D27.B- 29.28,16.29 27.77,16.29 D27.G- | 23.71,16.23 26.02,16.23 D27.R- | CN9.BD | D27.R- 25.69,16.31 | v23.71,16.44 23.71,16.23 | CN9.BD 22.46,22 26.09,18.38 26.09,17.99 | 23.71,16.23 21.83,16.23 v21.83,16.16 | D27.G- 27.72,16.31 | D27.R- 26.09,17.99 | v28.46,17.91 26.16,17.91 26.09,17.99 | CN9.BD 21.85,23.59 v21.83,23.61
GND9  (via drill 0.3, 0.41)
  Top 0.178: 40.33,16.44 40.33,20.68 D28.2 40.84,21.09 42.85,21.09 C10.2 | 40.33,16.44 40.33,16.31 D29.2 | v40.46,16.44 40.33,16.44 | v38.58,16.16 38.6,16.16 CN10.TD | U10.4 45.01,18.12 v45.21,17.91
  Bottom 0.178: D30.R- 42.85,16.29 44.42,16.29 D30.G- | 46.02,16.29 D30.B- 46.03,16.29 44.52,16.29 D30.G- | 40.46,16.23 42.77,16.23 D30.R- | CN10.BD | D30.R- 42.44,16.31 | v40.46,16.44 40.46,16.23 | CN10.BD 39.22,22 42.84,18.38 42.84,17.99 | 40.46,16.23 38.58,16.23 v38.58,16.16 | D30.G- 44.47,16.31 | D30.R- 42.84,17.99 | v45.21,17.91 42.91,17.91 42.84,17.99 | CN10.BD 38.6,23.59 v38.58,23.61
GND10  (via drill 0.3, 0.41)
  Top 0.178: 23.58,3.94 23.58,8.18 D31.2 24.09,8.59 26.1,8.59 C11.2 | 23.58,3.94 23.58,3.81 D32.2 | v23.71,3.94 23.58,3.94 | v21.83,3.66 21.85,3.66 CN11.TD | U11.4 28.26,5.62 v28.46,5.41
  Bottom 0.178: D33.R- 26.1,3.79 27.67,3.79 D33.G- | 29.27,3.79 D33.B- 29.28,3.79 27.77,3.79 D33.G- | 23.71,3.73 26.02,3.73 D33.R- | CN11.BD | D33.R- 25.69,3.81 | v23.71,3.94 23.71,3.73 | CN11.BD 22.46,9.5 26.09,5.88 26.09,5.49 | 23.71,3.73 21.83,3.73 v21.83,3.66 | D33.G- 27.72,3.81 | D33.R- 26.09,5.49 | v28.46,5.41 26.16,5.41 26.09,5.49 | CN11.BD 21.85,11.09 v21.83,11.11
GND11  (via drill 0.3, 0.41)
  Top 0.178: 40.33,3.94 40.33,8.18 D34.2 40.84,8.59 42.85,8.59 C12.2 | 40.33,3.94 40.33,3.81 D35.2 | v40.46,3.94 40.33,3.94 | v38.58,3.66 38.6,3.66 CN12.TD | U12.4 45.01,5.62 v45.21,5.41
  Bottom 0.178: D36.R- 42.85,3.79 44.42,3.79 D36.G- | 46.02,3.79 D36.B- 46.03,3.79 44.52,3.79 D36.G- | 40.46,3.73 42.77,3.73 D36.R- | CN12.BD | D36.R- 42.44,3.81 | v40.46,3.94 40.46,3.73 | CN12.BD 39.22,9.5 42.84,5.88 42.84,5.49 | 40.46,3.73 38.58,3.73 v38.58,3.66 | D36.G- 44.47,3.81 | D36.R- 42.84,5.49 | v45.21,5.41 42.91,5.41 42.84,5.49 | CN12.BD 38.6,11.09 v38.58,11.11
GREEN  (via drill 0.3)
  Top 0.178: U1.2 14.05,5.51 v14.02,5.49
  Bottom 0.178: R5.1 14.35,5.16 v14.02,5.49
GREEN1  (via drill 0.3)
  Top 0.178: U2.2 14.05,18.01 v14.02,17.99
  Bottom 0.178: R8.1 14.35,17.66 v14.02,17.99
GREEN2  (via drill 0.3)
  Top 0.178: U3.2 14.05,30.51 v14.02,30.49
  Bottom 0.178: R14.1 14.35,30.16 v14.02,30.49
GREEN3  (via drill 0.3)
  Top 0.178: U4.2 14.05,43.01 v14.02,42.99
  Bottom 0.178: R20.1 14.35,42.66 v14.02,42.99
GREEN4  (via drill 0.3)
  Top 0.178: U5.2 30.8,43.01 v30.77,42.99
  Bottom 0.178: R26.1 31.1,42.66 v30.77,42.99
GREEN5  (via drill 0.3)
  Top 0.178: U6.2 47.55,43.01 v47.52,42.99
  Bottom 0.178: R32.1 47.85,42.66 v47.52,42.99
GREEN6  (via drill 0.3)
  Top 0.178: U7.2 30.8,30.51 v30.77,30.49
  Bottom 0.178: R38.1 31.1,30.16 v30.77,30.49
GREEN7  (via drill 0.3)
  Top 0.178: U8.2 47.55,30.51 v47.52,30.49
  Bottom 0.178: R44.1 47.85,30.16 v47.52,30.49
GREEN8  (via drill 0.3)
  Top 0.178: U9.2 30.8,18.01 v30.77,17.99
  Bottom 0.178: R50.1 31.1,17.66 v30.77,17.99
GREEN9  (via drill 0.3)
  Top 0.178: U10.2 47.55,18.01 v47.52,17.99
  Bottom 0.178: R56.1 47.85,17.66 v47.52,17.99
GREEN10  (via drill 0.3)
  Top 0.178: U11.2 30.8,5.51 v30.77,5.49
  Bottom 0.178: R62.1 31.1,5.16 v30.77,5.49
GREEN11  (via drill 0.3)
  Top 0.178: U12.2 47.55,5.51 v47.52,5.49
  Bottom 0.178: R68.1 47.85,5.16 v47.52,5.49
GREENA
  Bottom 0.178: 15.16,6.76 15.24,6.83 R5.2 15.11,6.71 11.18,6.71 10.95,6.93 10.95,8.03 D3.G+
GREENA1
  Bottom 0.178: 15.16,19.26 15.24,19.33 R8.2 15.11,19.21 11.18,19.21 10.95,19.43 10.95,20.53 D6.G+
GREENA2
  Bottom 0.178: 15.16,31.76 15.24,31.83 R14.2 15.11,31.71 11.18,31.71 10.95,31.93 10.95,33.03 D9.G+
GREENA3
  Bottom 0.178: 15.16,44.26 15.24,44.33 R20.2 15.11,44.21 11.18,44.21 10.95,44.43 10.95,45.53 D12.G+
GREENA4
  Bottom 0.178: 31.91,44.26 31.99,44.33 R26.2 31.86,44.21 27.93,44.21 27.7,44.43 27.7,45.53 D15.G+
GREENA5
  Bottom 0.178: 48.66,44.26 48.74,44.33 R32.2 48.61,44.21 44.68,44.21 44.45,44.43 44.45,45.53 D18.G+
GREENA6
  Bottom 0.178: 31.91,31.76 31.99,31.83 R38.2 31.86,31.71 27.93,31.71 27.7,31.93 27.7,33.03 D21.G+
GREENA7
  Bottom 0.178: 48.66,31.76 48.74,31.83 R44.2 48.61,31.71 44.68,31.71 44.45,31.93 44.45,33.03 D24.G+
GREENA8
  Bottom 0.178: 31.91,19.26 31.99,19.33 R50.2 31.86,19.21 27.93,19.21 27.7,19.43 27.7,20.53 D27.G+
GREENA9
  Bottom 0.178: 48.66,19.26 48.74,19.33 R56.2 48.61,19.21 44.68,19.21 44.45,19.43 44.45,20.53 D30.G+
GREENA10
  Bottom 0.178: 31.91,6.76 31.99,6.83 R62.2 31.86,6.71 27.93,6.71 27.7,6.93 27.7,8.03 D33.G+
GREENA11
  Bottom 0.178: 48.66,6.76 48.74,6.83 R68.2 48.61,6.71 44.68,6.71 44.45,6.93 44.45,8.03 D36.G+
RED_MISO  (via drill 0.41)
  Top 0.178: U1.6 12.78,0.71 v12.7,0.64
  Bottom 0.178: R6.1 13.15,1.4 12.83,1.08 v12.7,0.64
RED_MISO1  (via drill 0.41)
  Top 0.178: U2.6 12.78,13.21 v12.7,13.13
  Bottom 0.178: R7.1 13.15,13.9 12.83,13.58 v12.7,13.13
RED_MISO2  (via drill 0.41)
  Top 0.178: U3.6 12.78,25.71 v12.7,25.64
  Bottom 0.178: R13.1 13.15,26.4 12.83,26.08 v12.7,25.64
RED_MISO3  (via drill 0.41)
  Top 0.178: U4.6 12.78,38.21 v12.7,38.13
  Bottom 0.178: R19.1 13.15,38.9 12.83,38.58 v12.7,38.13
RED_MISO4  (via drill 0.41)
  Top 0.178: U5.6 29.53,38.21 v29.45,38.13
  Bottom 0.178: R25.1 29.9,38.9 29.58,38.58 v29.45,38.13
RED_MISO5  (via drill 0.41)
  Top 0.178: U6.6 46.28,38.21 v46.2,38.13
  Bottom 0.178: R31.1 46.65,38.9 46.33,38.58 v46.2,38.13
RED_MISO6  (via drill 0.41)
  Top 0.178: U7.6 29.53,25.71 v29.45,25.64
  Bottom 0.178: R37.1 29.9,26.4 29.58,26.08 v29.45,25.64
RED_MISO7  (via drill 0.41)
  Top 0.178: U8.6 46.28,25.71 v46.2,25.64
  Bottom 0.178: R43.1 46.65,26.4 46.33,26.08 v46.2,25.64
RED_MISO8  (via drill 0.41)
  Top 0.178: U9.6 29.53,13.21 v29.45,13.13
  Bottom 0.178: R49.1 29.9,13.9 29.58,13.58 v29.45,13.13
RED_MISO9  (via drill 0.41)
  Top 0.178: U10.6 46.28,13.21 v46.2,13.13
  Bottom 0.178: R55.1 46.65,13.9 46.33,13.58 v46.2,13.13
RED_MISO10  (via drill 0.41)
  Top 0.178: U11.6 29.53,0.71 v29.45,0.64
  Bottom 0.178: R61.1 29.9,1.4 29.58,1.08 v29.45,0.64
RED_MISO11  (via drill 0.41)
  Top 0.178: U12.6 46.28,0.71 v46.2,0.64
  Bottom 0.178: R67.1 46.65,1.4 46.33,1.08 v46.2,0.64
REDA
  Bottom 0.178: 9.35,7.75 9.35,8.03 D3.R+ 9.34,6.51 9.75,6.1 12.39,6.1 13.41,5.08 13.41,3.25 13.61,3.05 15.16,3.05 15.24,3.12 R6.2
REDA1
  Bottom 0.178: 9.35,20.25 9.35,20.53 D6.R+ 9.34,19.01 9.75,18.6 12.39,18.6 13.41,17.58 13.41,15.75 13.61,15.55 15.16,15.55 15.24,15.62 R7.2
REDA2
  Bottom 0.178: 9.35,32.75 9.35,33.03 D9.R+ 9.34,31.51 9.75,31.1 12.39,31.1 13.41,30.08 13.41,28.25 13.61,28.05 15.16,28.05 15.24,28.12 R13.2
REDA3
  Bottom 0.178: 9.35,45.25 9.35,45.53 D12.R+ 9.34,44.01 9.75,43.6 12.39,43.6 13.41,42.58 13.41,40.75 13.61,40.55 15.16,40.55 15.24,40.62 R19.2
REDA4
  Bottom 0.178: 26.1,45.25 26.1,45.53 D15.R+ 26.09,44.01 26.5,43.6 29.14,43.6 30.16,42.58 30.16,40.75 30.36,40.55 31.91,40.55 31.99,40.62 R25.2
REDA5
  Bottom 0.178: 42.85,45.25 42.85,45.53 D18.R+ 42.84,44.01 43.25,43.6 45.9,43.6 46.91,42.58 46.91,40.75 47.11,40.55 48.66,40.55 48.74,40.62 R31.2
REDA6
  Bottom 0.178: 26.1,32.75 26.1,33.03 D21.R+ 26.09,31.51 26.5,31.1 29.14,31.1 30.16,30.08 30.16,28.25 30.36,28.05 31.91,28.05 31.99,28.12 R37.2
REDA7
  Bottom 0.178: 42.85,32.75 42.85,33.03 D24.R+ 42.84,31.51 43.25,31.1 45.9,31.1 46.91,30.08 46.91,28.25 47.11,28.05 48.66,28.05 48.74,28.12 R43.2
REDA8
  Bottom 0.178: 26.1,20.25 26.1,20.53 D27.R+ 26.09,19.01 26.5,18.6 29.14,18.6 30.16,17.58 30.16,15.75 30.36,15.55 31.91,15.55 31.99,15.62 R49.2
REDA9
  Bottom 0.178: 42.85,20.25 42.85,20.53 D30.R+ 42.84,19.01 43.25,18.6 45.9,18.6 46.91,17.58 46.91,15.75 47.11,15.55 48.66,15.55 48.74,15.62 R55.2
REDA10
  Bottom 0.178: 26.1,7.75 26.1,8.03 D33.R+ 26.09,6.51 26.5,6.1 29.14,6.1 30.16,5.08 30.16,3.25 30.36,3.05 31.91,3.05 31.99,3.12 R61.2
REDA11
  Bottom 0.178: 42.85,7.75 42.85,8.03 D36.R+ 42.84,6.51 43.25,6.1 45.9,6.1 46.91,5.08 46.91,3.25 47.11,3.05 48.66,3.05 48.74,3.12 R67.2
RES  (via drill 0.41)
  Top 0.178: U1.1 15.32,10.69 15.24,10.77 14.31,10.77 v13.97,11.11
RES1  (via drill 0.41)
  Top 0.178: U2.1 15.32,23.19 15.24,23.27 14.31,23.27 v13.97,23.61
RES2  (via drill 0.41)
  Top 0.178: U3.1 15.32,35.69 15.24,35.77 14.31,35.77 v13.97,36.11
RES3  (via drill 0.41)
  Top 0.178: U4.1 15.32,48.19 15.24,48.27 14.31,48.27 v13.97,48.61
RES4  (via drill 0.41)
  Top 0.178: U5.1 32.07,48.19 31.99,48.27 31.06,48.27 v30.72,48.61
RES5  (via drill 0.41)
  Top 0.178: U6.1 48.82,48.19 48.74,48.27 47.81,48.27 v47.47,48.61
RES6  (via drill 0.41)
  Top 0.178: U7.1 32.07,35.69 31.99,35.77 31.06,35.77 v30.72,36.11
RES7  (via drill 0.41)
  Top 0.178: U8.1 48.82,35.69 48.74,35.77 47.81,35.77 v47.47,36.11
RES8  (via drill 0.41)
  Top 0.178: U9.1 32.07,23.19 31.99,23.27 31.06,23.27 v30.72,23.61
RES9  (via drill 0.41)
  Top 0.178: U10.1 48.82,23.19 48.74,23.27 47.81,23.27 v47.47,23.61
RES10  (via drill 0.41)
  Top 0.178: U11.1 32.07,10.69 31.99,10.77 31.06,10.77 v30.72,11.11
RES11  (via drill 0.41)
  Top 0.178: U12.1 48.82,10.69 48.74,10.77 47.81,10.77 v47.47,11.11
VCC  (via drill 0.3, 0.41)
  Top 0.178: R3.2 C1.1 9.37,6.96 10.13,7.72 10.13,9.37 9.75,9.75 8.74,9.75 8.53,9.96 8.53,11.38 8.33,11.58 6.3,11.58 6.1,11.38 6.1,10.36 5.69,9.75 5.35,9.75 CN1.TA 5.11,9.53 | R3.2 9.42,4.88 10.16,4.88 10.36,4.67 10.36,4.06 | R3.2 9.38,4.88 | U1.8 15.32,1.29 15.04,1.02 14.02,1.02 | 14.02,1.02 13.61,1.02 13.41,1.22 13.41,3.86 13.21,4.06 10.36,4.06 | 10.36,4.06 10.36,2.49 10.11,2.23 8.74,2.23 8.53,2.03 8.53,0.61 8.33,0.41 5.28,0.41 5.08,0.61 v5.08,1.22 | 14.02,1.02 v14.02,0.64
  Bottom 0.178: CN1.BA 5.11,2.49 5.28,2.31 5.08,2.31 v5.08,1.22
VCC1  (via drill 0.3, 0.41)
  Top 0.178: R12.2 C2.1 9.37,19.46 10.13,20.22 10.13,21.87 9.75,22.25 8.74,22.25 8.53,22.46 8.53,23.88 8.33,24.08 6.3,24.08 6.1,23.88 6.1,22.86 5.69,22.25 5.35,22.25 CN2.TA 5.11,22.02 | R12.2 9.42,17.38 10.16,17.38 10.36,17.17 10.36,16.56 | R12.2 9.38,17.38 | U2.8 15.32,13.79 15.04,13.52 14.02,13.52 | 14.02,13.52 13.61,13.52 13.41,13.72 13.41,16.36 13.21,16.56 10.36,16.56 | 10.36,16.56 10.36,14.99 10.11,14.73 8.74,14.73 8.53,14.53 8.53,13.11 8.33,12.91 5.28,12.91 5.08,13.11 v5.08,13.72 | 14.02,13.52 v14.02,13.13
  Bottom 0.178: CN2.BA 5.28,14.81 5.08,14.81 v5.08,13.72
VCC2  (via drill 0.3, 0.41)
  Top 0.178: R18.2 C3.1 9.37,31.96 10.13,32.72 10.13,34.37 9.75,34.75 8.74,34.75 8.53,34.96 8.53,36.38 8.33,36.58 6.3,36.58 6.1,36.38 6.1,35.36 5.69,34.75 5.35,34.75 CN3.TA 5.11,34.52 | R18.2 9.42,29.88 10.16,29.88 10.36,29.67 10.36,29.06 | R18.2 9.38,29.88 | U3.8 15.32,26.3 15.04,26.02 14.02,26.02 | 14.02,26.02 13.61,26.02 13.41,26.22 13.41,28.86 13.21,29.06 10.36,29.06 | 10.36,29.06 10.36,27.49 10.11,27.23 8.74,27.23 8.53,27.03 8.53,25.61 8.33,25.41 5.28,25.41 5.08,25.61 v5.08,26.22 | 14.02,26.02 v14.02,25.64
  Bottom 0.178: CN3.BA 5.28,27.31 5.08,27.31 v5.08,26.22
VCC3  (via drill 0.3, 0.41)
  Top 0.178: R24.2 C4.1 9.37,44.46 10.13,45.22 10.13,46.87 9.75,47.25 8.74,47.25 8.53,47.46 8.53,48.88 8.33,49.08 6.3,49.08 6.1,48.88 6.1,47.86 5.69,47.25 5.35,47.25 CN4.TA 5.11,47.02 | R24.2 9.42,42.38 10.16,42.38 10.36,42.17 10.36,41.56 | R24.2 9.38,42.38 | U4.8 15.32,38.8 15.04,38.52 14.02,38.52 | 14.02,38.52 13.61,38.52 13.41,38.72 13.41,41.36 13.21,41.56 10.36,41.56 | 10.36,41.56 10.36,39.99 10.11,39.73 8.74,39.73 8.53,39.53 8.53,38.11 8.33,37.91 5.28,37.91 5.08,38.11 v5.08,38.72 | 14.02,38.52 v14.02,38.13
  Bottom 0.178: CN4.BA 5.11,39.99 5.28,39.81 5.08,39.81 v5.08,38.72
VCC4  (via drill 0.3, 0.41)
  Top 0.178: R30.2 C5.1 26.12,44.46 26.89,45.22 26.89,46.87 26.5,47.25 25.49,47.25 25.28,47.46 25.28,48.88 25.08,49.08 23.05,49.08 22.85,48.88 22.85,47.86 22.44,47.25 22.1,47.25 CN5.TA 21.86,47.02 | R30.2 26.17,42.38 26.91,42.38 27.11,42.17 27.11,41.56 | R30.2 26.13,42.38 | U5.8 32.07,38.8 31.79,38.52 30.77,38.52 | 30.77,38.52 30.36,38.52 30.16,38.72 30.16,41.36 29.96,41.56 27.11,41.56 | 27.11,41.56 27.11,39.99 26.86,39.73 25.49,39.73 25.28,39.53 25.28,38.11 25.08,37.91 22.03,37.91 21.83,38.11 v21.83,38.72 | 30.77,38.52 v30.77,38.13
  Bottom 0.178: CN5.BA 21.86,39.99 22.03,39.81 21.83,39.81 v21.83,38.72
VCC5  (via drill 0.3, 0.41)
  Top 0.178: R36.2 C6.1 42.87,44.46 43.63,45.22 43.63,46.87 43.25,47.25 42.24,47.25 42.03,47.46 42.03,48.88 41.83,49.08 39.8,49.08 39.6,48.88 39.6,47.86 39.19,47.25 38.85,47.25 CN6.TA 38.6,47.02 | R36.2 42.92,42.38 43.66,42.38 43.86,42.17 43.86,41.56 | R36.2 42.88,42.38 | U6.8 48.82,38.8 48.54,38.52 47.52,38.52 | 47.52,38.52 47.11,38.52 46.91,38.72 46.91,41.36 46.71,41.56 43.86,41.56 | 43.86,41.56 43.86,39.99 43.61,39.73 42.24,39.73 42.03,39.53 42.03,38.11 41.83,37.91 38.78,37.91 38.58,38.11 v38.58,38.72 | 47.52,38.52 v47.52,38.13
  Bottom 0.178: CN6.BA 38.6,39.99 38.78,39.81 38.58,39.81 v38.58,38.72
VCC6  (via drill 0.3, 0.41)
  Top 0.178: R42.2 C7.1 26.12,31.96 26.89,32.72 26.89,34.37 26.5,34.75 25.49,34.75 25.28,34.96 25.28,36.38 25.08,36.58 23.05,36.58 22.85,36.38 22.85,35.36 22.44,34.75 22.1,34.75 CN7.TA 21.86,34.52 | R42.2 26.17,29.88 26.91,29.88 27.11,29.67 27.11,29.06 | R42.2 26.13,29.88 | U7.8 32.07,26.3 31.79,26.02 30.77,26.02 | 30.77,26.02 30.36,26.02 30.16,26.22 30.16,28.86 29.96,29.06 27.11,29.06 | 27.11,29.06 27.11,27.49 26.86,27.23 25.49,27.23 25.28,27.03 25.28,25.61 25.08,25.41 22.03,25.41 21.83,25.61 v21.83,26.22 | 30.77,26.02 v30.77,25.64
  Bottom 0.178: CN7.BA 22.03,27.31 21.83,27.31 v21.83,26.22
VCC7  (via drill 0.3, 0.41)
  Top 0.178: R48.2 C8.1 42.87,31.96 43.63,32.72 43.63,34.37 43.25,34.75 42.24,34.75 42.03,34.96 42.03,36.38 41.83,36.58 39.8,36.58 39.6,36.38 39.6,35.36 39.19,34.75 38.85,34.75 CN8.TA 38.6,34.52 | R48.2 42.92,29.88 43.66,29.88 43.86,29.67 43.86,29.06 | R48.2 42.88,29.88 | U8.8 48.82,26.3 48.54,26.02 47.52,26.02 | 47.52,26.02 47.11,26.02 46.91,26.22 46.91,28.86 46.71,29.06 43.86,29.06 | 43.86,29.06 43.86,27.49 43.61,27.23 42.24,27.23 42.03,27.03 42.03,25.61 41.83,25.41 38.78,25.41 38.58,25.61 v38.58,26.22 | 47.52,26.02 v47.52,25.64
  Bottom 0.178: CN8.BA 38.78,27.31 38.58,27.31 v38.58,26.22
VCC8  (via drill 0.3, 0.41)
  Top 0.178: R54.2 C9.1 26.12,19.46 26.89,20.22 26.89,21.87 26.5,22.25 25.49,22.25 25.28,22.46 25.28,23.88 25.08,24.08 23.05,24.08 22.85,23.88 22.85,22.86 22.44,22.25 22.1,22.25 CN9.TA 21.86,22.02 | R54.2 26.17,17.38 26.91,17.38 27.11,17.17 27.11,16.56 | R54.2 26.13,17.38 | U9.8 32.07,13.79 31.79,13.52 30.77,13.52 | 30.77,13.52 30.36,13.52 30.16,13.72 30.16,16.36 29.96,16.56 27.11,16.56 | 27.11,16.56 27.11,14.99 26.86,14.73 25.49,14.73 25.28,14.53 25.28,13.11 25.08,12.91 22.03,12.91 21.83,13.11 v21.83,13.72 | 30.77,13.52 v30.77,13.13
  Bottom 0.178: CN9.BA 22.03,14.81 21.83,14.81 v21.83,13.72
VCC9  (via drill 0.3, 0.41)
  Top 0.178: R60.2 C10.1 42.87,19.46 43.63,20.22 43.63,21.87 43.25,22.25 42.24,22.25 42.03,22.46 42.03,23.88 41.83,24.08 39.8,24.08 39.6,23.88 39.6,22.86 39.19,22.25 38.85,22.25 CN10.TA 38.6,22.02 | R60.2 42.92,17.38 43.66,17.38 43.86,17.17 43.86,16.56 | R60.2 42.88,17.38 | U10.8 48.82,13.79 48.54,13.52 47.52,13.52 | 47.52,13.52 47.11,13.52 46.91,13.72 46.91,16.36 46.71,16.56 43.86,16.56 | 43.86,16.56 43.86,14.99 43.61,14.73 42.24,14.73 42.03,14.53 42.03,13.11 41.83,12.91 38.78,12.91 38.58,13.11 v38.58,13.72 | 47.52,13.52 v47.52,13.13
  Bottom 0.178: CN10.BA 38.78,14.81 38.58,14.81 v38.58,13.72
VCC10  (via drill 0.3, 0.41)
  Top 0.178: R66.2 C11.1 26.12,6.96 26.89,7.72 26.89,9.37 26.5,9.75 25.49,9.75 25.28,9.96 25.28,11.38 25.08,11.58 23.05,11.58 22.85,11.38 22.85,10.36 22.44,9.75 22.1,9.75 CN11.TA 21.86,9.53 | R66.2 26.17,4.88 26.91,4.88 27.11,4.67 27.11,4.06 | R66.2 26.13,4.88 | U11.8 32.07,1.29 31.79,1.02 30.77,1.02 | 30.77,1.02 30.36,1.02 30.16,1.22 30.16,3.86 29.96,4.06 27.11,4.06 | 27.11,4.06 27.11,2.49 26.86,2.23 25.49,2.23 25.28,2.03 25.28,0.61 25.08,0.41 22.03,0.41 21.83,0.61 v21.83,1.22 | 30.77,1.02 v30.77,0.64
  Bottom 0.178: CN11.BA 21.86,2.49 22.03,2.31 21.83,2.31 v21.83,1.22
VCC11  (via drill 0.3, 0.41)
  Top 0.178: R72.2 C12.1 42.87,6.96 43.63,7.72 43.63,9.37 43.25,9.75 42.24,9.75 42.03,9.96 42.03,11.38 41.83,11.58 39.8,11.58 39.6,11.38 39.6,10.36 39.19,9.75 38.85,9.75 CN12.TA 38.6,9.53 | R72.2 42.92,4.88 43.66,4.88 43.86,4.67 43.86,4.06 | R72.2 42.88,4.88 | U12.8 48.82,1.29 48.54,1.02 47.52,1.02 | 47.52,1.02 47.11,1.02 46.91,1.22 46.91,3.86 46.71,4.06 43.86,4.06 | 43.86,4.06 43.86,2.49 43.61,2.23 42.24,2.23 42.03,2.03 42.03,0.61 41.83,0.41 38.78,0.41 38.58,0.61 v38.58,1.22 | 47.52,1.02 v47.52,0.64
  Bottom 0.178: CN12.BA 38.6,2.49 38.78,2.31 38.58,2.31 v38.58,1.22

## Text on the board
tPlace: SMALLROOMLABS | r1 | SMALLROOMLABS | r1 | SMALLROOMLABS | r1 | c | c | c | 3 | 3 | 3 | r | uCoNo | r | uCoNo | r | uCoNo | r2 | r2 | r2 | SMALLROOMLABS | r1 | SMALLROOMLABS | r1 | SMALLROOMLABS | r1 | c | c | c | 3 | 3 | 3 | uCoNo | uCoNo | uCoNo | r | r | r | r2 | r2 | r2 | SMALLROOMLABS | r1 | SMALLROOMLABS | r1 | SMALLROOMLABS | r1 | c | c | c | 3 | 3 | 3 | r | uCoNo | r | uCoNo | r | uCoNo | r2 | r2 | r2 | SMALLROOMLABS | r1 | SMALLROOMLABS | r1 | SMALLROOMLABS | r1 | c | c | c | 3 | 3 | 3 | uCoNo | uCoNo | uCoNo | r | r | r | r2 | r2 | r2
bPlace: SmallRoomLabs | v1 | SmallRoomLabs | v1 | SmallRoomLabs | v1 | r | r | r | 4 | 4 | 4 | r | r | r | 5 | 5 | 5 | r | r | r | 6 | 6 | 6 | uCoNo | uCoNo | uCoNo | SmallRoomLabs | v1 | SmallRoomLabs | v1 | SmallRoomLabs | v1 | r | r | r | 4 | 4 | 4 | r | r | r | 5 | 5 | 5 | r | r | r | 6 | 6 | 6 | uCoNo | uCoNo | uCoNo | SmallRoomLabs | v1 | SmallRoomLabs | v1 | SmallRoomLabs | v1 | r | r | r | 4 | 4 | 4 | r | r | r | 5 | 5 | 5 | r | r | r | 6 | 6 | 6 | uCoNo | uCoNo | uCoNo | SmallRoomLabs | v1 | SmallRoomLabs | v1 | SmallRoomLabs | v1 | r | r | r | 4 | 4 | 4 | r | r | r | 5 | 5 | 5 | r | r | r | 6 | 6 | 6 | uCoNo | uCoNo | uCoNo